# EAGLE board dual_soil_probe_2T_12Apr2020b (EAGLE 9.6.0)
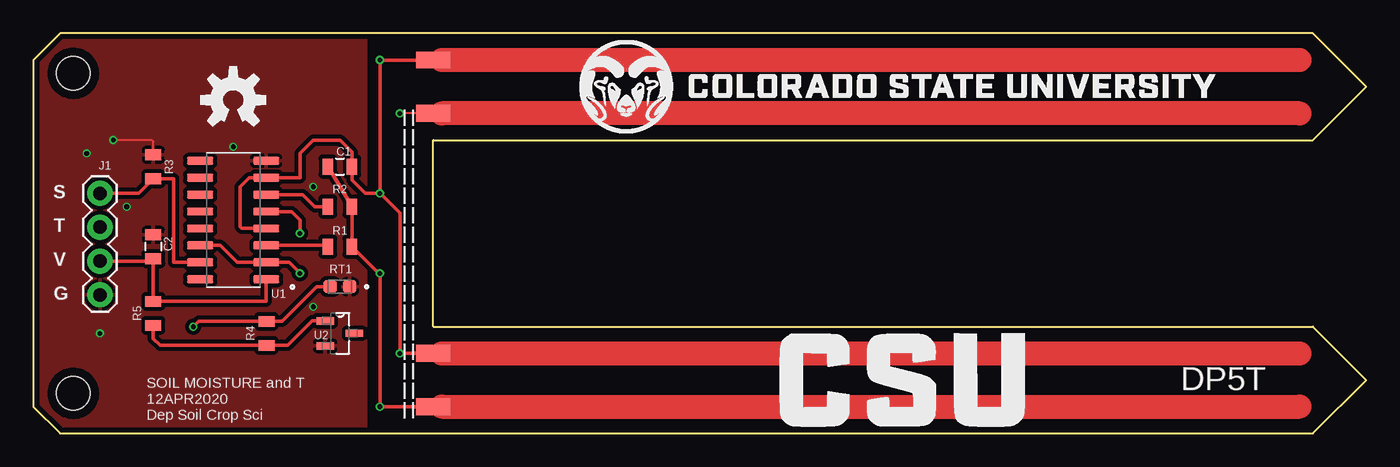
[diagram p0: board, top side]
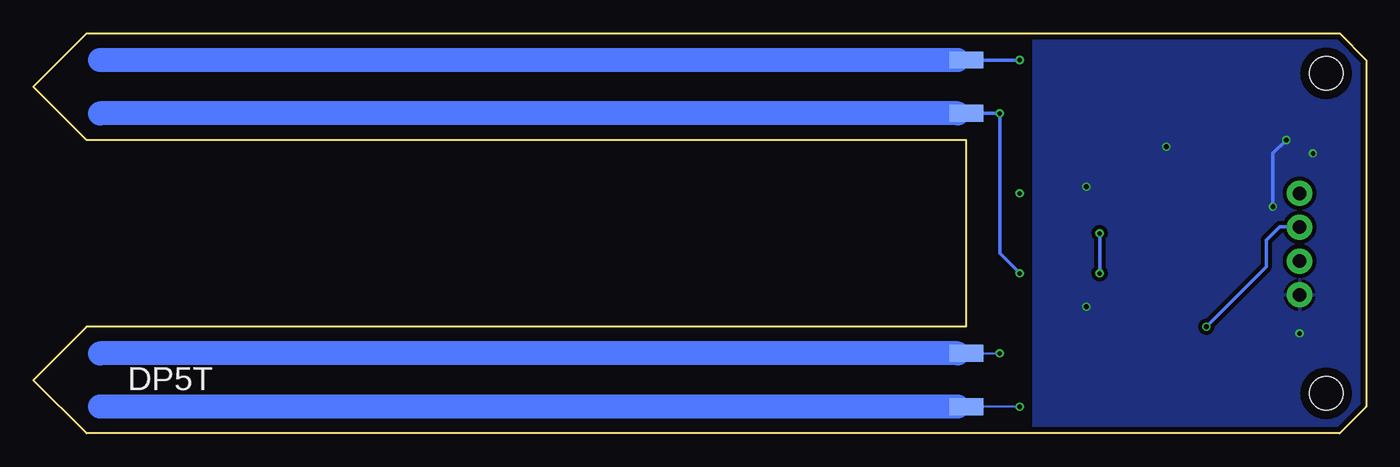
[diagram p1: board, bottom side, seen from below]

Size 100 x 30 mm. Coordinates in mm from the lower left corner, seen from the top.
Outline: 100,4 96,0 2,0 0,2 0,28 2,30 96,30 100,26 96,22 30,22 30,8 96,8 100,4
Copper layers (1*16): Top 0.035559375mm / dielectric 1.6mm / Bottom 0.035559375mm
Design rules "oshpark-2layer": minimum track width 6mil, minimum drill 10mil, track to track 6mil, track to pad 6mil, pad to pad 6mil, via to via 6mil, smd to smd 6mil, copper to edge 15mil, drill to drill 6mil, minimum pad ring 5mil, minimum via ring 5mil, stop-mask expansion 2.5mil, vias tented up to drill 0mil, thermal gap 10mil
Net classes: 0 default: clearance 0.305 mm; 1 Prob: clearance 1.499 mm

## Footprints (pad centres in the part's own frame; a part is rotated, then mirrored left to right if it is on the bottom)
SPARKFUN-CAPACITORS_0805$1 = smd 0.8 x 1.2: 1 -0.9,0; 2 0.9,0
CUSTOM-COMPONENTS_STAND-OFF-M2.5 = hole 2.54: 0,0
1X04 = drill 1.016 pad 1.88: 1 0,0; 2 2.54,0; 3 5.08,0; 4 7.62,0
0805 = smd 0.8 x 1.2: 1 -0.9,0; 2 0.9,0
THERM_NCP18XH103F03RB = smd 1 x 0.97: 1 -0.735,0; 2 0.735,0
SHORT_TOP-50 = smd 1.27 x 1.27: 1 0.635,0; 2 -0.635,0
SOIC127P600X175-16N = smd 1.95 x 0.59: 1 -2.48,4.445; 2 -2.48,3.175; 3 -2.48,1.905; 4 -2.48,0.635; 5 -2.48,-0.635; 6 -2.48,-1.905; 7 -2.48,-3.175; 8 -2.48,-4.445; 9 2.48,-4.445; 10 2.48,-3.175; 11 2.48,-1.905; 12 2.48,-0.635; 13 2.48,0.635; 14 2.48,1.905; 15 2.48,3.175; 16 2.48,4.445
SOT95P237X112-3N = smd 1.321 x 0.559: 1 -1.092,0.94; 2 -1.092,-0.94 | smd 1.321 x 0.508: 3 1.092,0

## Placement (x,y rotation side)
C1  470pF  [SPARKFUN-CAPACITORS_0805$1]  23,20 0 top
C2  0.1uF  [SPARKFUN-CAPACITORS_0805$1]  9,14 270 top
FRAME1  FRAME-LETTERNO_PACKAGE  [DUMMY]  -9,0 0 top  (outside the outline)
H1  CUSTOM-COMPONENTS_STAND-OFF-M2.5  [CUSTOM-COMPONENTS_STAND-OFF-M2.5]  3,3 0 top
H2  CUSTOM-COMPONENTS_STAND-OFF-M2.5  [CUSTOM-COMPONENTS_STAND-OFF-M2.5]  3,27 0 top
J1  [1X04]  5,18 270 top
LOGO1  OSHW-LOGOM  [OSHW-LOGO-M]  15,25 0 top
R1  2K  [0805]  23,14 0 top
R2  47K  [0805]  23,17 180 top
R3  47K  [0805]  9,20 270 top
R4  10K  [0805]  17.5,7.5 90 top
R5  750  [0805]  9,9 90 top
RT1  NCP18XH103F03RB  [THERM_NCP18XH103F03RB]  23,11 180 top
SA1  SHORT-VT5  [SHORT_TOP-50]  30,2 180 top
SA2  SHORT-VT5  [SHORT_TOP-50]  30,24 0 top
SA3  SHORT-VT5  [SHORT_TOP-50]  30,2 0 bottom
SA4  SHORT-VT5  [SHORT_TOP-50]  30,24 0 bottom
SC1  SHORT-VT5  [SHORT_TOP-50]  30,6 0 top
SC2  SHORT-VT5  [SHORT_TOP-50]  30,28 0 top
SC3  SHORT-VT5  [SHORT_TOP-50]  30,6 180 bottom
SC4  SHORT-VT5  [SHORT_TOP-50]  30,28 180 bottom
U1  MC14049BDG  [SOIC127P600X175-16N]  15,16 180 top
U2  LM4040D82IDBZR  [SOT95P237X112-3N]  23,7.5 0 top
U$1  CSU-SIGNATURE-LOGO7MM  [CSU-SIGNATURE-7MM]  41,22.5 0 top
U$2  [CSU-NAME-7MM]  56,0.5 0 top

## Library data of the parts
C1 C2 H1 H2 = Carrier Board
FRAME1 = SparkFun-Aesthetics; DESIGNER: Nobody; VERSION: v01
J1 = SparkFun-Connectors; PROD_ID: CONN-09696
LOGO1 = SparkFun-Aesthetics
R1-R5 = SparkFun-Resistors
RT1 = NCP18XH103F03RB; AVAILABILITY: Unavailable; DESCRIPTION: NTC Thermistor 10k 0603 _1608 Metric_; MF: Murata; MP: NCP18XH103F03RB; PACKAGE: 0603 Murata; PRICE: None
SA1-SA4 SC1-SC4 = shorts-old; BOM: no
U1 = MC14049BDG; AVAILABILITY: Unavailable; DESCRIPTION: Inverter IC 6 Channel 16-SOIC; MF: ON Semiconductor; MP: MC14049BDG; PACKAGE: SOIC-16 ON Semiconductor; PRICE: None
U2 = LM4040D82IDBZR; AVAILABILITY: Unavailable; DESCRIPTION: Shunt Voltage Reference IC ±1% SOT-23-3; MF: Texas Instruments; MP: LM4040D82IDBZR; PACKAGE: TO-236 Texas Instruments; PRICE: None
U$1 U$2 = HamLab-Aesthetics

## Nets
A1 [Prob]: SA1.2
A2 [Prob]: SA2.1
A3: SA3.2
A4: SA4.2
C1: SC1.1
C2: SC2.1
C3: SC3.1
C4: SC4.1
GND: C2.1 J1.4 R3.1 RT1.1 U1.8 U2.2
N$2: R1.1 U1.3
N$3: R2.2 U1.6
N$6: C1.2 SC1.2 SC2.2 SC3.2 SC4.2 U1.4 U1.7
N$8: U1.2 U1.5 U1.14
N$10: C1.1 R1.2 R2.1 SA1.1 SA2.2 SA3.1 SA4.1
TEMP: J1.2 R4.2 RT1.2
VCC: C2.2 J1.3 R5.2 U1.1
VOUT: J1.1 R3.2 U1.15
VREF25: R4.1 R5.1 U2.1

## Tracks (layer width: path | path; a pad name or v marks a point on that pad's centre or on a via)
A1
  Top 1.8: SA1.2 95,2
A2
  Top 1.8: 95,24 SA2.1
A3
  Bottom 1.8: SA3.2 95,2
A4
  Bottom 1.8: SA4.2 95,24
C1
  Top 1.8: SC1.1 95,6
C2
  Top 1.8: 95,28 SC2.1
C3
  Bottom 1.8: SC3.1 95,6
C4
  Bottom 1.8: SC4.1 95,28
GND  (via drill 0.35)
  Top 0.152: R3.1 9,21.9 8.9,22 v6,22
  Bottom 0.254: v6,22 7,21 v7,17
  other vias: 21,18.5 5,7.5 4,21 15,21.5 21,9.5
  pour Top: -1,32 -1,-3 25,-3 25,32
  pour Bottom: -1,37 25,37 25,-7 -1,-7
N$2
  Top 0.254: R1.1 22,14.1 U1.3
N$3
  Top 0.254: R2.2 21.1,17 20.2,17.91 U1.6
N$6  (via drill 0.35)
  Top 0.254: U1.4 15.63,15.37 15.5,15.5 15.5,18.5 16.18,19.18 U1.7 20,19.18 20,21 21,22 23,22 23.9,21.1 C1.2 23.9,19 24.9,18 v26,18 | SC3.2 v27.5,6 27.5,16.5 v26,18 | v26,18 v26,28 SC4.2
  Bottom 0.152: SC3.2 v27.5,6
  Bottom 0.254: SC4.2 v26,28
N$8  (via drill 0.35)
  Top 0.254: v20,15 20,16 19.36,16.64 U1.5 | v20,12 19.18,12.82 U1.2 15.29,12.82 14.02,14.1 U1.14
  Bottom 0.254: v20,15 v20,12
N$10  (via drill 0.35)
  Top 0.152: SA4.1 v27.5,24
  Top 0.254: C1.1 R2.1 R1.2 25.9,12 v26,12 v26,2 SA3.1
  Bottom 0.152: v26,2 SA3.1
  Bottom 0.254: v26,12 27.5,13.5 v27.5,24 SA4.1
TEMP  (via drill 0.35)
  Top 0.254: RT1.2 21.27,11 18.66,8.4 R4.2 12.4,8.4 v12,8
  Bottom 0.152: 5.04,15.5 J1.2
  Bottom 0.254: v12,8 7.5,12.5 7.5,14.5 6.5,15.5 5.04,15.5
VCC
  Top 0.152: C2.2 8.9,12.92
  Top 0.254: U1.1 17.48,9.9 R5.2 C2.2 | 8.9,12.92 J1.3
VOUT
  Top 0.254: J1.1 7.9,18 R3.2 10.52,19.1 10.52,12.82 U1.15
VREF25
  Top 0.254: U2.1 20.91,8.44 19.07,6.6 R4.1 9.5,6.6 9,7.1 R5.1

## Text on the board
tPlace: S / T / V / G | DP5T | SOIL MOISTURE and T / 12APR2020 / Dep Soil Crop Sci | ================
bPlace: DP5T